# Altium PCB DUT_ATSAMD51J20A-AU.PcbDoc
Units mm, origin at the board's own origin, x right, y up, seen from the top; angles counter-clockwise.
Board outline 33 x 90 mm, 2 copper layers (Top Layer, Bottom Layer); 13 components, 64 nets, 240 pads, 0 vias.
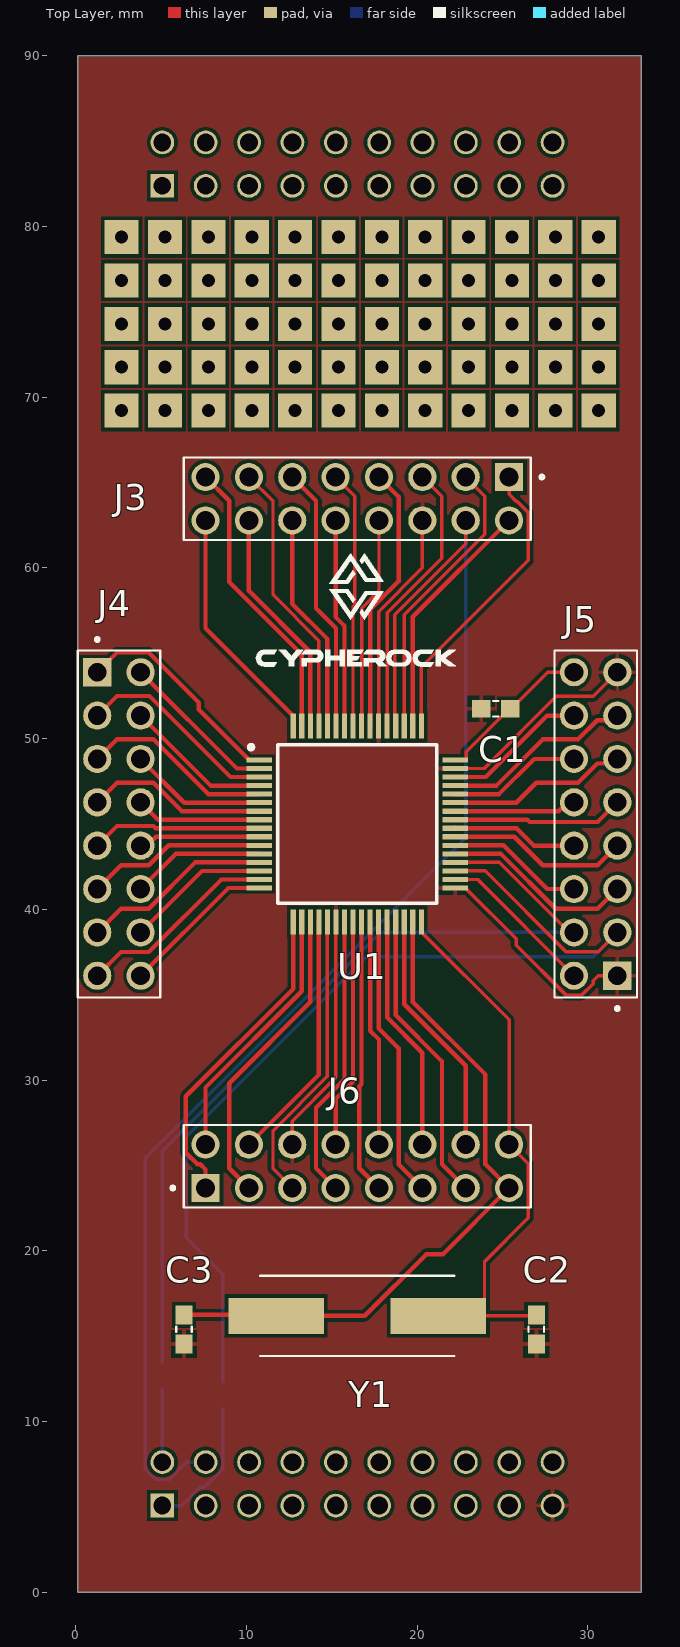
[diagram p0: Top Layer view]
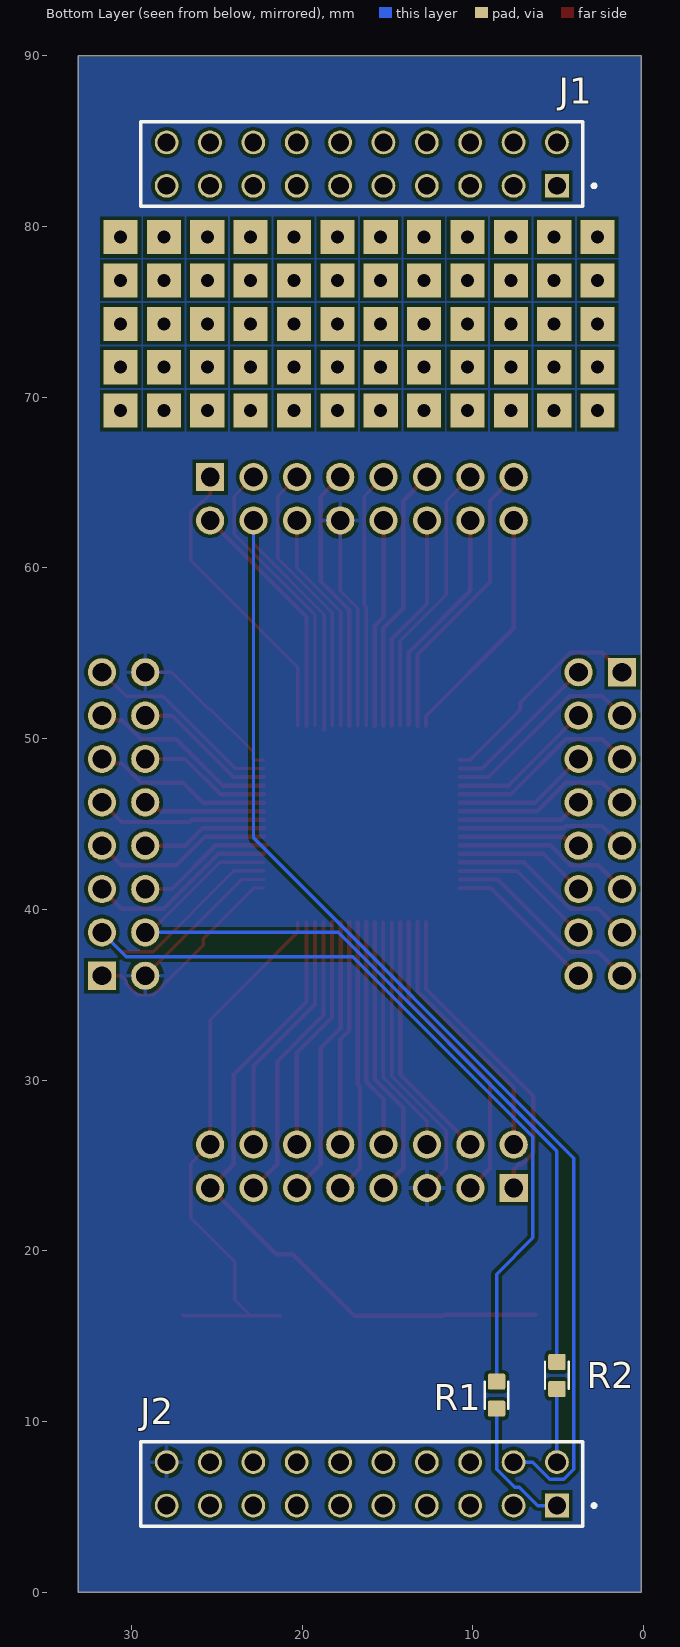
[diagram p1: Bottom Layer view, seen from below]
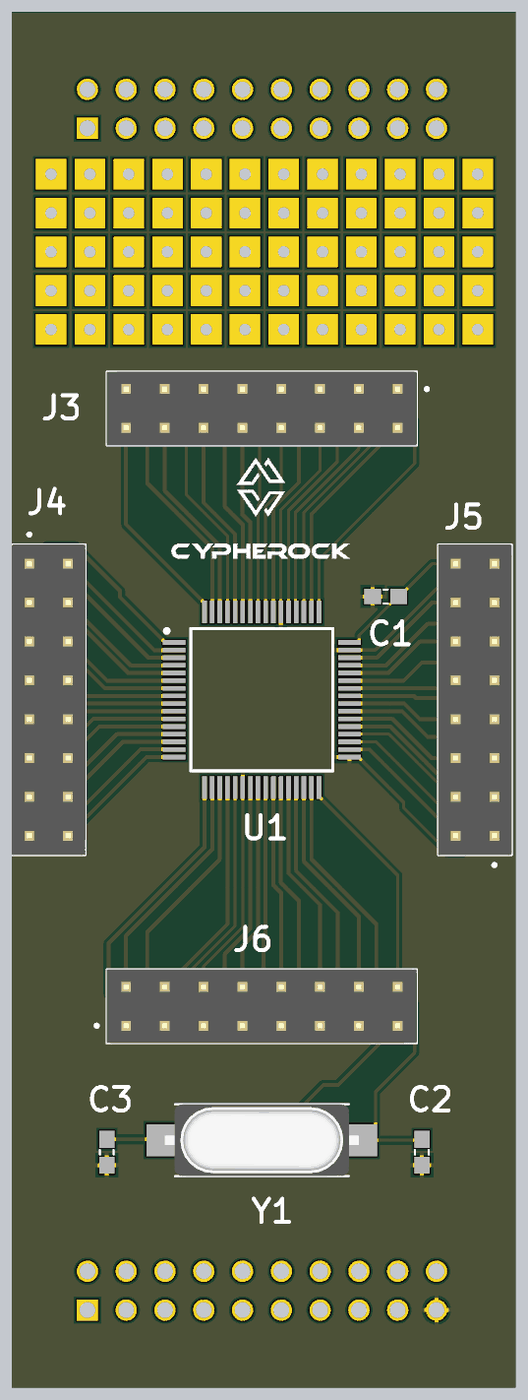
[diagram p2: 3D render of the assembled board from above, using the file's embedded part models]

## Layer stack, top to bottom
Top Solder: solder mask 0.0102, Solder Resist, Dk 3.5
Top Layer: signal copper 0.0356
Dielectric 1: dielectric 0.32, FR-4, Dk 4.8
Bottom Layer: signal copper 0.0356
Bottom Solder: solder mask 0.0102, Solder Resist, Dk 3.5

## Board outline
0.127,0 0.127,90 33.127,90 33.127,0

## Design rules (kind name [scope] priority, off if disabled: settings)
Clearance [All] p1: gap=0.2 ignorepadtopadclearanceinfootprint=FALSE
PolygonConnect [All] p1: connectstyle=Relief reliefconductorwidth=0.254 reliefentries=4 polygonreliefangle="90 Angle" airgapwidth=0.254
RoutingVias [All] p1: holewidth=0.711 width=1.27 viastyle="Through Hole" minholewidth=0.711 minwidth=1.27 maxholewidth=0.711 maxwidth=1.27
SolderMaskExpansion [All] p1: expansion=0.102 istentingtop=FALSE
Width [All] p1: maxlimit=0.254 minlimit=0.2 preferedwidth=0.254 minimp=50.000000 maximp=50.000000 favimp=50.000000
30 further rules are at their usual default settings.

## Components (designator, comment, footprint, x,y, rotation, side; value= is the part's Value field where it differs from the comment)
C1 "0.1uF" CAPC1608X90 24.606,51.752 r180 top
C2 "27pF" CAPC1608X90 26.987,15.399 r90 top
C3 "27pF" CAPC1608X90 6.35,15.399 r90 top
J1 "SSW-110-01-G-D-LL" SAMTEC_SSW-110-01-G-D-LL 5.08,82.38 r180 bottom
J2 "SSW-110-01-G-D-LL" SAMTEC_SSW-110-01-G-D-LL 5.08,5.08 r180 bottom locked
J3 "77313-124-16LF" AMPHENOL_77313-124-16LF 16.5,64.05 r180 top locked
J4 "77313-124-16LF" AMPHENOL_77313-124-16LF 2.54,45 r270 top locked
J5 "77313-124-16LF" AMPHENOL_77313-124-16LF 30.46,45 r90 top
J6 "77313-124-16LF" AMPHENOL_77313-124-16LF 16.5,24.95 r0 top locked
R1 "0E/0.1W" RESC1608X50N 8.615,11.545 r270 bottom
R2 "0E/0.1W" RESC1608X50N 5.08,12.7 r90 bottom
U1 "ATSAMD51J20A-AU" QFP50P1200X1200X120-64N 16.5,45 r0 top locked
Y1 "ABLS-8.000MHZ-B2-T" XTAL_ABLS-8.000MHZ-B2-T 16.5,16.192 r180 top

## Footprints (in the part's own frame and the unit in brackets; to place one, negate y for a bottom-side part, rotate by r counter-clockwise, add the part's x,y. Pads: shape width x height; smd on the part's side, far side on the other; paste and mask are expansions set on the pad)
AMPHENOL_77313-124-16LF [mm]
  rect 1.65x1.65 / inner round 1.65 / far side rect 1.65x1.65 hole 1.1: 01(-8.89,-1.27)
  round 1.65 hole 1.1: 02(-8.89,1.27) 03(-6.35,-1.27) 04(-6.35,1.27) 05(-3.81,-1.27) 06(-3.81,1.27) 07(-1.27,-1.27) 08(-1.27,1.27) 09(1.27,-1.27) 10(1.27,1.27) 11(3.81,-1.27) 12(3.81,1.27) 13(6.35,-1.27) 14(6.35,1.27) 15(8.89,-1.27) 16(8.89,1.27)
  silkscreen extent -10.91,-2.41 10.16,2.41, body extent -10.16,-2.41 10.16,2.41, height 9.3
CAPC1608X90 [mm]
  rect 1.1x1 smd: 1(-0.85,0) 2(0.85,0)
  silkscreen extent -0.15,-0.45 0.15,0.45
QFP50P1200X1200X120-64N [mm]
  rect 1.475x0.3 smd: 1(-5.738,3.75) 2(-5.738,3.25) 3(-5.738,2.75) 4(-5.738,2.25) 5(-5.738,1.75) 6(-5.738,1.25) 7(-5.738,0.75) 8(-5.738,0.25) 9(-5.738,-0.25) 10(-5.738,-0.75) 11(-5.738,-1.25) 12(-5.738,-1.75) 13(-5.738,-2.25) 14(-5.738,-2.75) 15(-5.738,-3.25) 16(-5.738,-3.75) 33(5.738,-3.75) 34(5.738,-3.25) 35(5.738,-2.75) 36(5.738,-2.25) 37(5.738,-1.75) 38(5.738,-1.25) 39(5.738,-0.75) 40(5.738,-0.25) 41(5.738,0.25) 42(5.738,0.75) 43(5.738,1.25) 44(5.738,1.75) 45(5.738,2.25) 46(5.738,2.75) 47(5.738,3.25) 48(5.738,3.75)
  rect 0.3x1.475 smd: 17(-3.75,-5.738) 18(-3.25,-5.738) 19(-2.75,-5.738) 20(-2.25,-5.738) 21(-1.75,-5.738) 22(-1.25,-5.738) 23(-0.75,-5.738) 24(-0.25,-5.738) 25(0.25,-5.738) 26(0.75,-5.738) 27(1.25,-5.738) 28(1.75,-5.738) 29(2.25,-5.738) 30(2.75,-5.738) 31(3.25,-5.738) 32(3.75,-5.738) 49(3.75,5.738) 50(3.25,5.738) 51(2.75,5.738) 52(2.25,5.738) 53(1.75,5.738) 54(1.25,5.738) 55(0.75,5.738) 56(0.25,5.738) 57(-0.25,5.738) 58(-0.75,5.738) 59(-1.25,5.738) 60(-1.75,5.738) 61(-2.25,5.738) 62(-2.75,5.738) 63(-3.25,5.738) 64(-3.75,5.738)
  silkscreen extent -6.35,-4.65 4.65,4.65
RESC1608X50N [mm]
  rrect20% 0.94x1.02 smd: 1(-0.79,0) 2(0.79,0)
  silkscreen extent -0.8,-0.69 0.8,0.69, body extent -0.8,-0.4 0.8,0.4, height 0.23
SAMTEC_SSW-110-01-G-D-LL [mm]
  rect 1.39x1.39 hole 1.04: 01(0,0)
  round 1.39 hole 1.04: 02(0,2.54) 03(-2.54,0) 04(-2.54,2.54) 05(-5.08,0) 06(-5.08,2.54) 07(-7.62,0) 08(-7.62,2.54) 09(-10.16,0) 10(-10.16,2.54) 11(-12.7,0) 12(-12.7,2.54) 13(-15.24,0) 14(-15.24,2.54) 15(-17.78,0) 16(-17.78,2.54) 17(-20.32,0) 18(-20.32,2.54) 19(-22.86,0) 20(-22.86,2.54)
  silkscreen extent -24.39,-1.21 2.27,3.75
XTAL_ABLS-8.000MHZ-B2-T [mm]
  rect 5.6x2.1 smd: 1(-4.75,0) 2(4.75,0)
  silkscreen extent -5.7,-2.35 5.7,2.35, body extent -6.35,-2.35 6.35,2.35, height 4.06

## Part data
C1: library part CC0603MRX5R7BB106, "CAP CER 10UF 16V X5R 0603", Package=None, Availability=Unavailable, MP=CC0603MRX5R7BB106, Price=None
C2 C3: library part CC0603MRX5R7BB106, "0603", Package=None, Availability=Unavailable, MP=CC0603MRX5R7BB106, Price=None
J1 J2: Package=None, Availability=Unavailable, MF="Samtec Inc.", MP=SSW-110-01-G-D-LL, Price=None
J3 J4 J5 J6: "BergStikÂ®, Board to Board connector, Unshrouded Header, 2.54 mm Pitch, Vertical, Double Row,Through Hole, 16 Positions", Package=None, Check_prices=https://www.snapeda.com/parts/77313-124-16LF/Amphenol+FCI/view-part/?ref=eda, MF="Amphenol ICC (FCI)", MP=77313-124-16LF, SnapEDA_Link=https://www.snapeda.com/parts/77313-124-16LF/Amphenol+FCI/view-part/?ref=snap
R1 R2: library part 3-1879460-5, "RES 0.27 OHM 1% 1/10W 0603", Package=0603, Power_Rating=".1 W", Resistance=27, Tolerance=1%, Availability="In Stock", Check_prices=https://www.snapeda.com/parts/3-1879460-5/TE+Connectivity/view-part/?ref=eda, EU_RoHS_Compliance="Compliant with Exemptions", MF="TE Connectivity", MP=3-1879460-5, Price=None, SnapEDA_Link=https://www.snapeda.com/parts/3-1879460-5/TE+Connectivity/view-part/?ref=snap
U1: "MICROCHIP - ATSAMD51J20A-AU - 120MHZ 1024KB Flash 64 TQFP PKG inTray  85CTemp, 64 TQFP 10x10x1mm TRAY", Manufacturer_Name=Microchip, Mouser Part Number=556-ATSAMD51J20AAU, Datasheet Link=https://datasheet.datasheetarchive.com/originals/distributors/DKDS41/DSANUWW0026725.pdf, Geometry.Height=1.2mm, Manufacturer_Part_Number=ATSAMD51J20A-AU, Mouser Price/Stock=https://www.mouser.co.uk/ProductDetail/Microchip-Technology/ATSAMD51J20A-AU?qs=HXFqYaX1Q2znyZCbfgJJAQ%3D%3D
Y1: "HC/49US (AT49) SMD LOW PROFILE CRYSTAL", Package="HC49/US Abracon", Availability="In Stock", Check_prices=https://www.snapeda.com/parts/ABLS-8.000MHZ-B2-T/Abracon+LLC/view-part/?ref=eda, MF="Abracon LLC", MP=ABLS-8.000MHZ-B2-T, Price=None, Purchase-URL=https://pricing.snapeda.com/search/part/ABLS-8.000MHZ-B2-T/?ref=eda, SnapEDA_Link=https://www.snapeda.com/parts/ABLS-8.000MHZ-B2-T/Abracon+LLC/view-part/?ref=snap

## Free pads (board coordinates)
  rect 2x2 hole 0.762: 17(2.699,69.215) 17(2.699,71.755) 17(2.699,74.295) 17(2.699,76.835) 17(2.699,79.375) 17(5.239,69.215) 17(5.239,71.755) 17(5.239,74.295) 17(5.239,76.835) 17(5.239,79.375) 17(7.779,69.215) 17(7.779,71.755) 17(7.779,74.295) 17(7.779,76.835) 17(7.779,79.375) 17(10.319,69.215) 17(10.319,71.755) 17(10.319,74.295) 17(10.319,76.835) 17(10.319,79.375) 17(12.859,69.215) 17(12.859,71.755) 17(12.859,74.295) 17(12.859,76.835) 17(12.859,79.375) 17(15.399,69.215) 17(15.399,71.755) 17(15.399,74.295) 17(15.399,76.835) 17(15.399,79.375) 17(17.939,69.215) 17(17.939,71.755) 17(17.939,74.295) 17(17.939,76.835) 17(17.939,79.375) 17(20.479,69.215) 17(20.479,71.755) 17(20.479,74.295) 17(20.479,76.835) 17(20.479,79.375) 17(23.019,69.215) 17(23.019,71.755) 17(23.019,74.295) 17(23.019,76.835) 17(23.019,79.375) 17(25.559,69.215) 17(25.559,71.755) 17(25.559,74.295) 17(25.559,76.835) 17(25.559,79.375) 17(28.099,69.215) 17(28.099,71.755) 17(28.099,74.295) 17(28.099,76.835) 17(28.099,79.375) 17(30.639,69.215) 17(30.639,71.755) 17(30.639,74.295) 17(30.639,76.835) 17(30.639,79.375)

## Nets (pads, with @x,y where several pads share a name; then routed paths per layer and width w, separated by ;. In a path a pad name is that pad's centre, name@x,y a point inside that pad or via, vN(x,y) a via of type N, cw(c..) or ccw(c..) an arc to the next point about the centre after c; other vN are vias at no path point)
3V3: C1.1 J2.20 J3.08 J5.02 J5.16 J6.05 U1.21 U1.34 U1.48 U1.56 | length 48.4
  Top Layer w0.2: J6.05 11.565,24.805 11.565,27.031 14.75,30.216 U1.21 ; U1.56 16.75,57.649 17.77,58.669 J3.08 ; U1.34 23.55,41.75 J5.02 ; U1.48 22.826,48.75 22.876,48.8 22.876,49.222 25.406,51.752 C1.1 25.506,51.752 27.644,53.89 J5.16
GND: J2.17
GNDA: C1.2 C2.1 C3.1 J2.19 J3.06 J5.01 J5.15 J6.06 U1.22 U1.33 U1.47 U1.54 | length 51.9
  Top Layer w0.2: J6.06 12.69,27.59 15.25,30.15 U1.22 ; U1.54 17.75,57.441 20.31,60.001 J3.06 ; U1.33 22.826,41.25 25.8,38.276 25.8,37.909 28.724,34.985 29.656,34.985 30.315,35.644 30.315,35.82 30.605,36.11 J5.01 ; U1.47 23.927,48.25 28.152,52.475 30.315,52.475 J5.15
NetC2_2: C2.2 J6.16 U1.32 Y1.1 | length 32.9
  Top Layer w0.2: U1.32 20.25,38.674 25.39,33.534 J6.16 26.515,25.095 26.515,21.927 23.95,19.362 23.95,17.143 Y1.1@23,16.192 ; Y1.1 Y1.1@23,16.192 ; C2.2 26.931,16.192 Y1.1@23,16.192
NetC3_2: C3.2 J6.15 U1.31 Y1.2 | length 40.1
  Top Layer w0.254: C3.2 11.694,16.249 Y1.2 16.938,16.192 20.548,19.803 21.513,19.803 J6.15 24.002,25.068 24.002,30.326 19.75,34.578 U1.31
NetJ2_01: J2.01 R1.2 | length 8
  Bottom Layer w0.2: J2.01 6.213,5.08 7.277,6.144 7.551,6.144 8.615,7.208 R1.2
NetJ2_02: J2.02 R2.1 | length 4.3
  Bottom Layer w0.2: J2.02 R2.1
NetJ2_03: J2.03
NetJ2_04: J2.04 J3.04 U1.52 | length 81.5
  Top Layer w0.2: U1.52@18.7,50.482 18.7,57.26 22.85,61.41 J3.04
  Bottom Layer w0.2: J2.04 6.487,7.62 5.492,6.625 4.668,6.625 4.085,7.208 4.085,25.417 22.85,44.182 J3.04
NetJ2_07: J2.07
NetJ2_08: J2.08
NetJ3_01: J3.01 U1.49 | length 17.7
  Top Layer w0.2: U1.49 20.25,54.178 26.515,60.443 26.515,63.246 25.856,63.905 25.796,63.905 25.39,64.311 J3.01
NetJ3_02: J3.02 U1.50 | length 14.4
  Top Layer w0.254: U1.50 19.75,57.14 J3.02
NetJ3_03: J3.03 U1.51 | length 17
  Top Layer w0.2: U1.51 19.25,57.244 23.975,61.969 23.975,64.195 J3.03
NetJ3_05: J3.05 U1.53 | length 16.4
  Top Layer w0.2: U1.53 18.25,57.375 21.435,60.56 21.435,64.195 J3.05
NetJ3_07: J3.07 U1.55 | length 15.8
  Top Layer w0.254: U1.55 17.25,57.545 18.922,59.217 18.922,64.168 J3.07
NetJ3_09: J3.09 U1.57 | length 15.1
  Top Layer w0.2: J3.09 16.355,64.195 16.355,57.819 16.25,57.714 U1.57
NetJ3_10: J3.10 U1.58 | length 12.3
  Top Layer w0.254: J3.10 15.23,57.124 15.75,56.604 U1.58
NetJ3_11: J3.11 U1.59 | length 15.6
  Top Layer w0.254: J3.11 14.078,63.932 14.078,57.634 15.25,56.462 U1.59
NetJ3_12: J3.12 U1.60 | length 12.9
  Top Layer w0.254: J3.12 12.69,57.894 14.75,55.834 U1.60
NetJ3_13: J3.13 U1.61 | length 16.3
  Top Layer w0.2: J3.13 11.565,63.905 11.565,58.415 14.25,55.73 U1.61
NetJ3_14: J3.14 U1.62 | length 13.5
  Top Layer w0.254: J3.14 10.15,58.664 13.75,55.064 13.75,50.823 U1.62@13.773,50.8
NetJ3_15: J3.15 U1.63 | length 16.9
  Top Layer w0.254: J3.15 8.998,63.932 8.998,59.174 13.25,54.922 U1.63
NetJ3_16: J3.16 U1.64 | length 14.2
  Top Layer w0.254: J3.16 7.61,56.466 12.75,51.326 U1.64
NetJ4_01: J4.01 U1.1 | length 12.8
  Top Layer w0.254: J4.01 2.422,55.042 4.287,55.042 7.219,52.11 7.219,51.705 10.174,48.75 U1.1
NetJ4_02: J4.02 U1.2 | length 9.3
  Top Layer w0.254: J4.02 9.45,48.25 U1.2
NetJ4_03: J4.03 U1.3 | length 11.9
  Top Layer w0.254: J4.03 2.422,52.502 4.328,52.502 9.08,47.75 U1.3
NetJ4_04: J4.04 U1.4 | length 8.7
  Top Layer w0.254: J4.04 7.91,47.25 U1.4
NetJ4_05: J4.05 U1.5 | length 11.3
  Top Layer w0.254: J4.05 2.422,49.962 4.556,49.962 7.768,46.75 U1.5
NetJ4_06: J4.06 U1.6 | length 8
  Top Layer w0.254: J4.06 6.37,46.25 U1.6
NetJ4_07: J4.07 U1.7 | length 10.7
  Top Layer w0.254: J4.07 2.422,47.422 4.556,47.422 6.228,45.75 U1.7
NetJ4_08: J4.08 U1.8 | length 7.4
  Top Layer w0.254: J4.08 4.83,45.25 U1.8
NetJ4_09: J4.09 U1.9 | length 10
  Top Layer w0.254: J4.09 2.422,44.882 4.556,44.882 4.688,44.75 U1.9
NetJ4_10: J4.10 U1.10 | length 7.2
  Top Layer w0.254: J4.10 4.188,43.73 4.708,44.25 U1.10
NetJ4_11: J4.11 U1.11 | length 10.6
  Top Layer w0.254: J4.11 2.658,42.578 4.287,42.578 5.459,43.75 U1.11
NetJ4_12: J4.12 U1.12 | length 7.8
  Top Layer w0.254: J4.12 5.87,43.25 U1.12
NetJ4_13: J4.13 U1.13 | length 11.2
  Top Layer w0.254: J4.13 2.658,40.038 4.287,40.038 6.999,42.75 U1.13
NetJ4_14: J4.14 U1.14 | length 8.4
  Top Layer w0.254: J4.14 7.41,42.25 U1.14
NetJ4_15: J4.15 U1.15 | length 11.8
  Top Layer w0.254: J4.15 2.658,37.498 4.287,37.498 8.539,41.75 U1.15
NetJ4_16: J4.16 U1.16 | length 9.1
  Top Layer w0.254: J4.16 8.95,41.25 U1.16
NetJ5_03: J5.03 R1.1 U1.35 | length 57.3
  Top Layer w0.2: U1.35 23.999,42.25 28.724,37.525 30.605,37.525 J5.03
  Bottom Layer w0.2: R1.1 8.615,18.63 6.485,20.76 6.485,26.686 17.034,37.235 30.315,37.235 J5.03
NetJ5_04: J5.04 R2.2 U1.36 | length 50.4
  Top Layer w0.2: U1.36 24.815,42.75 28.915,38.65 J5.04
  Bottom Layer w0.2: R2.2 5.08,25.847 17.883,38.65 J5.04
NetJ5_05: J5.05 U1.37 | length 11.3
  Top Layer w0.254: U1.37 24.918,43.25 28.13,40.038 30.578,40.038 J5.05
NetJ5_06: J5.06 U1.38 | length 8.2
  Top Layer w0.254: U1.38@22.066,43.773 22.089,43.75 U1.38 25.06,43.75 27.62,41.19 J5.06
NetJ5_07: J5.07 U1.39 | length 10.7
  Top Layer w0.254: U1.39 25.688,44.25 27.36,42.578 30.578,42.578 J5.07
NetJ5_08: J5.08 U1.40 | length 7.4
  Top Layer w0.254: U1.40@22.225,44.773 22.248,44.75 25.83,44.75 26.85,43.73 J5.08
NetJ5_09: J5.09 U1.41 | length 10
  Top Layer w0.254: U1.41 26.458,45.25 26.59,45.118 30.578,45.118 J5.09
NetJ5_10: J5.10 U1.42 | length 7.2
  Top Layer w0.254: U1.42 28.292,45.75 28.812,46.27 J5.10
NetJ5_11: J5.11 U1.43 | length 10.6
  Top Layer w0.254: U1.43 25.809,46.25 26.981,47.422 29.431,47.422 30.552,48.543 31.463,48.543 J5.11
NetJ5_12: J5.12 U1.44 | length 7.8
  Top Layer w0.254: U1.44 24.8,46.75 26.86,48.81 J5.12
NetJ5_13: J5.13 U1.45 | length 11.2
  Top Layer w0.254: U1.45 24.658,47.25 27.37,49.962 29.431,49.962 30.552,51.083 31.463,51.083 J5.13
NetJ5_14: J5.14 U1.46 | length 8.4
  Top Layer w0.254: U1.46 24.03,47.75 27.63,51.35 J5.14
NetJ6_01: J6.01 U1.17 | length 18.8
  Top Layer w0.254: J6.01 7.61,24.761 7.302,25.068 7.133,25.068 6.458,25.743 6.458,29.051 12.75,35.343 U1.17
NetJ6_02: J6.02 U1.18 | length 15.4
  Top Layer w0.254: J6.02 7.61,29.561 13.25,35.201 U1.18
NetJ6_03: J6.03 U1.19 | length 18
  Top Layer w0.254: J6.03 8.998,24.832 8.998,29.821 13.75,34.573 U1.19
NetJ6_04: J6.04 U1.20 | length 14.7
  Top Layer w0.254: J6.04 14.25,30.32 U1.20
NetJ6_07: J6.07 U1.23 | length 16.8
  Top Layer w0.254: J6.07 14.078,24.832 14.078,28.375 15.75,30.047 U1.23
NetJ6_08: J6.08 U1.24 | length 13.5
  Top Layer w0.254: J6.08 15.23,28.885 16.25,29.905 U1.24
NetJ6_09: J6.09 U1.25 | length 16.1
  Top Layer w0.254: U1.25 16.75,29.762 16.618,29.63 16.618,24.832 J6.09
NetJ6_10: J6.10 U1.26 | length 13.3
  Top Layer w0.254: U1.26 17.25,32.896 17.77,32.376 J6.10
NetJ6_11: J6.11 U1.27 | length 16.6
  Top Layer w0.254: U1.27 17.75,33.038 18.922,31.866 18.922,25.068 J6.11
NetJ6_12: J6.12 U1.28 | length 13.9
  Top Layer w0.254: U1.28 18.25,33.666 20.31,31.606 J6.12
NetJ6_13: J6.13 U1.29 | length 17.3
  Top Layer w0.254: U1.29 18.75,33.808 21.462,31.096 21.462,25.068 J6.13
NetJ6_14: J6.14 U1.30 | length 14.5
  Top Layer w0.254: U1.30 19.25,34.436 22.85,30.836 J6.14
pads on no net: J1.01 J1.02 J1.03 J1.04 J1.05 J1.06 J1.07 J1.08 J1.09 J1.10 J1.11 J1.12 J1.13 J1.14 J1.15 J1.16 J1.17 J1.18 J1.19 J1.20 J2.05 J2.06 J2.09 J2.10 J2.11 J2.12 J2.13 J2.14 J2.15 J2.16 J2.18

## Polygon pours and split planes (outlines as drawn)
3V3 on Bottom Layer "3V3_L02_P001" (solid, remove dead copper, pour order 1): 0.127,89.916 0.127,0 33.147,0 33.147,89.916
GNDA on Top Layer "GNDA_L01_P000" (solid, remove dead copper, pour order 0): 0.127,89.916 0.127,0 33.147,0 33.147,89.916

## Silkscreen, mask and mechanical layers (free items; w line width, h text height)
Top Overlay:
  drawing of 11 lines, arcs and shapes, not listed